# Altium PCB PCB1.PcbDoc
Units mil, origin at the board's own origin, x right, y up, seen from the top; angles counter-clockwise.
Board outline 3005 x 2305 mil, 4 copper layers (Top Layer, Power, GND, Bottom Layer), stack 27 mil thick; 35 components, 32 nets, 112 pads, 2 vias.
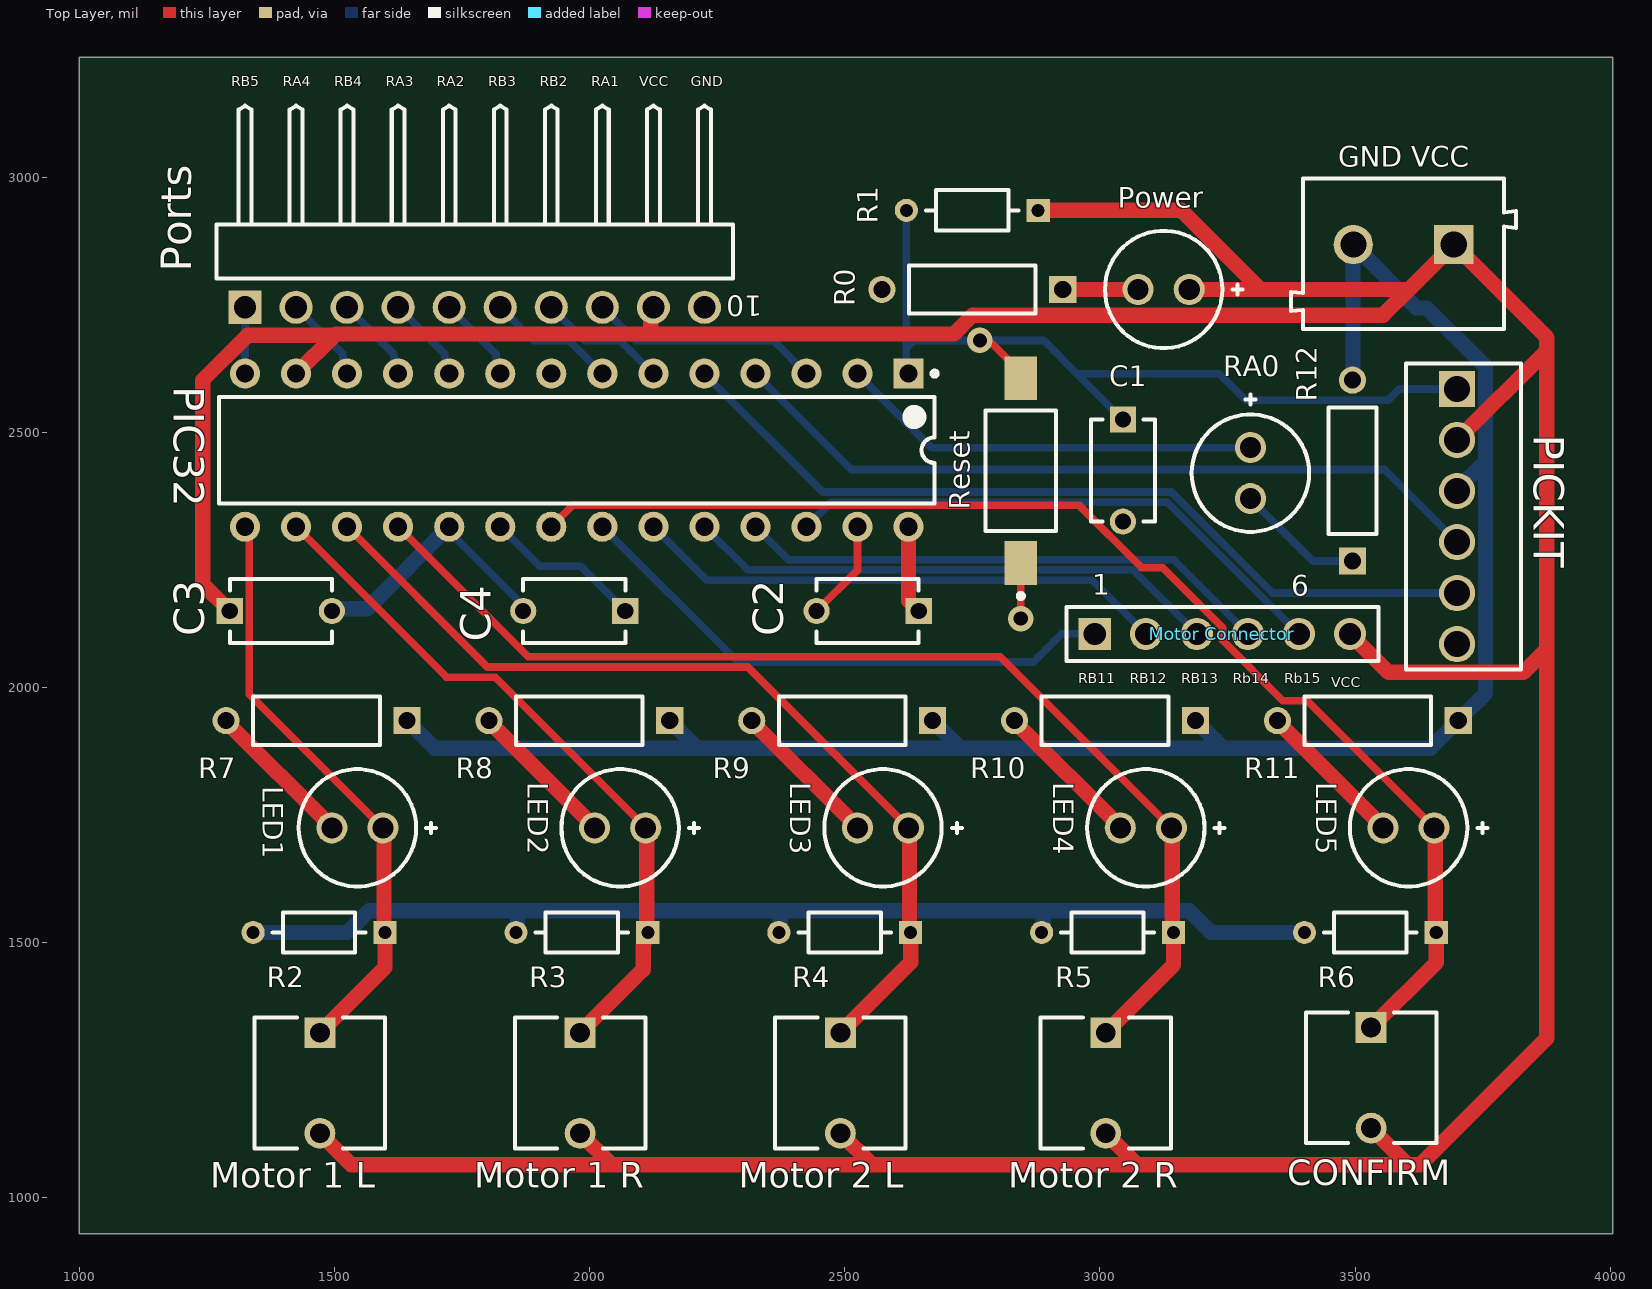
[diagram p0: Top Layer view]
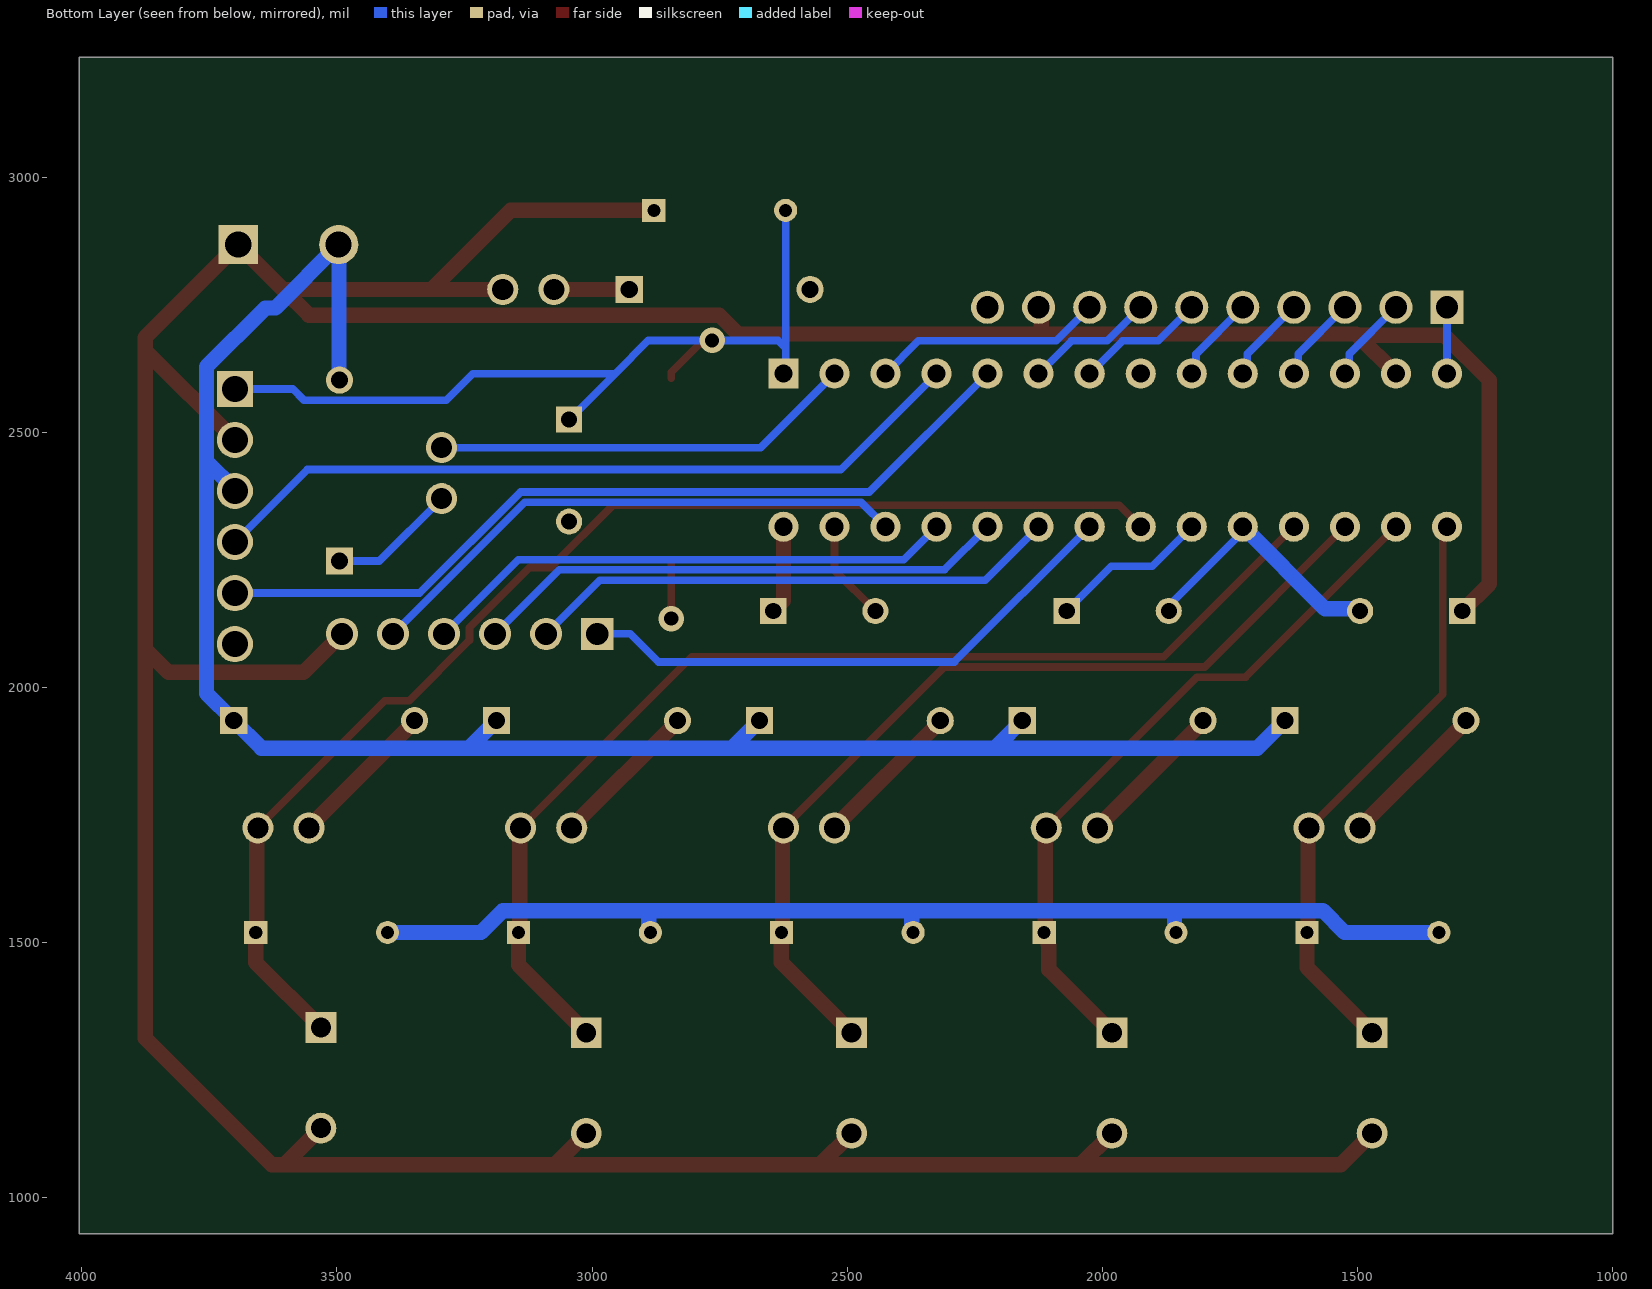
[diagram p1: Bottom Layer view, seen from below]
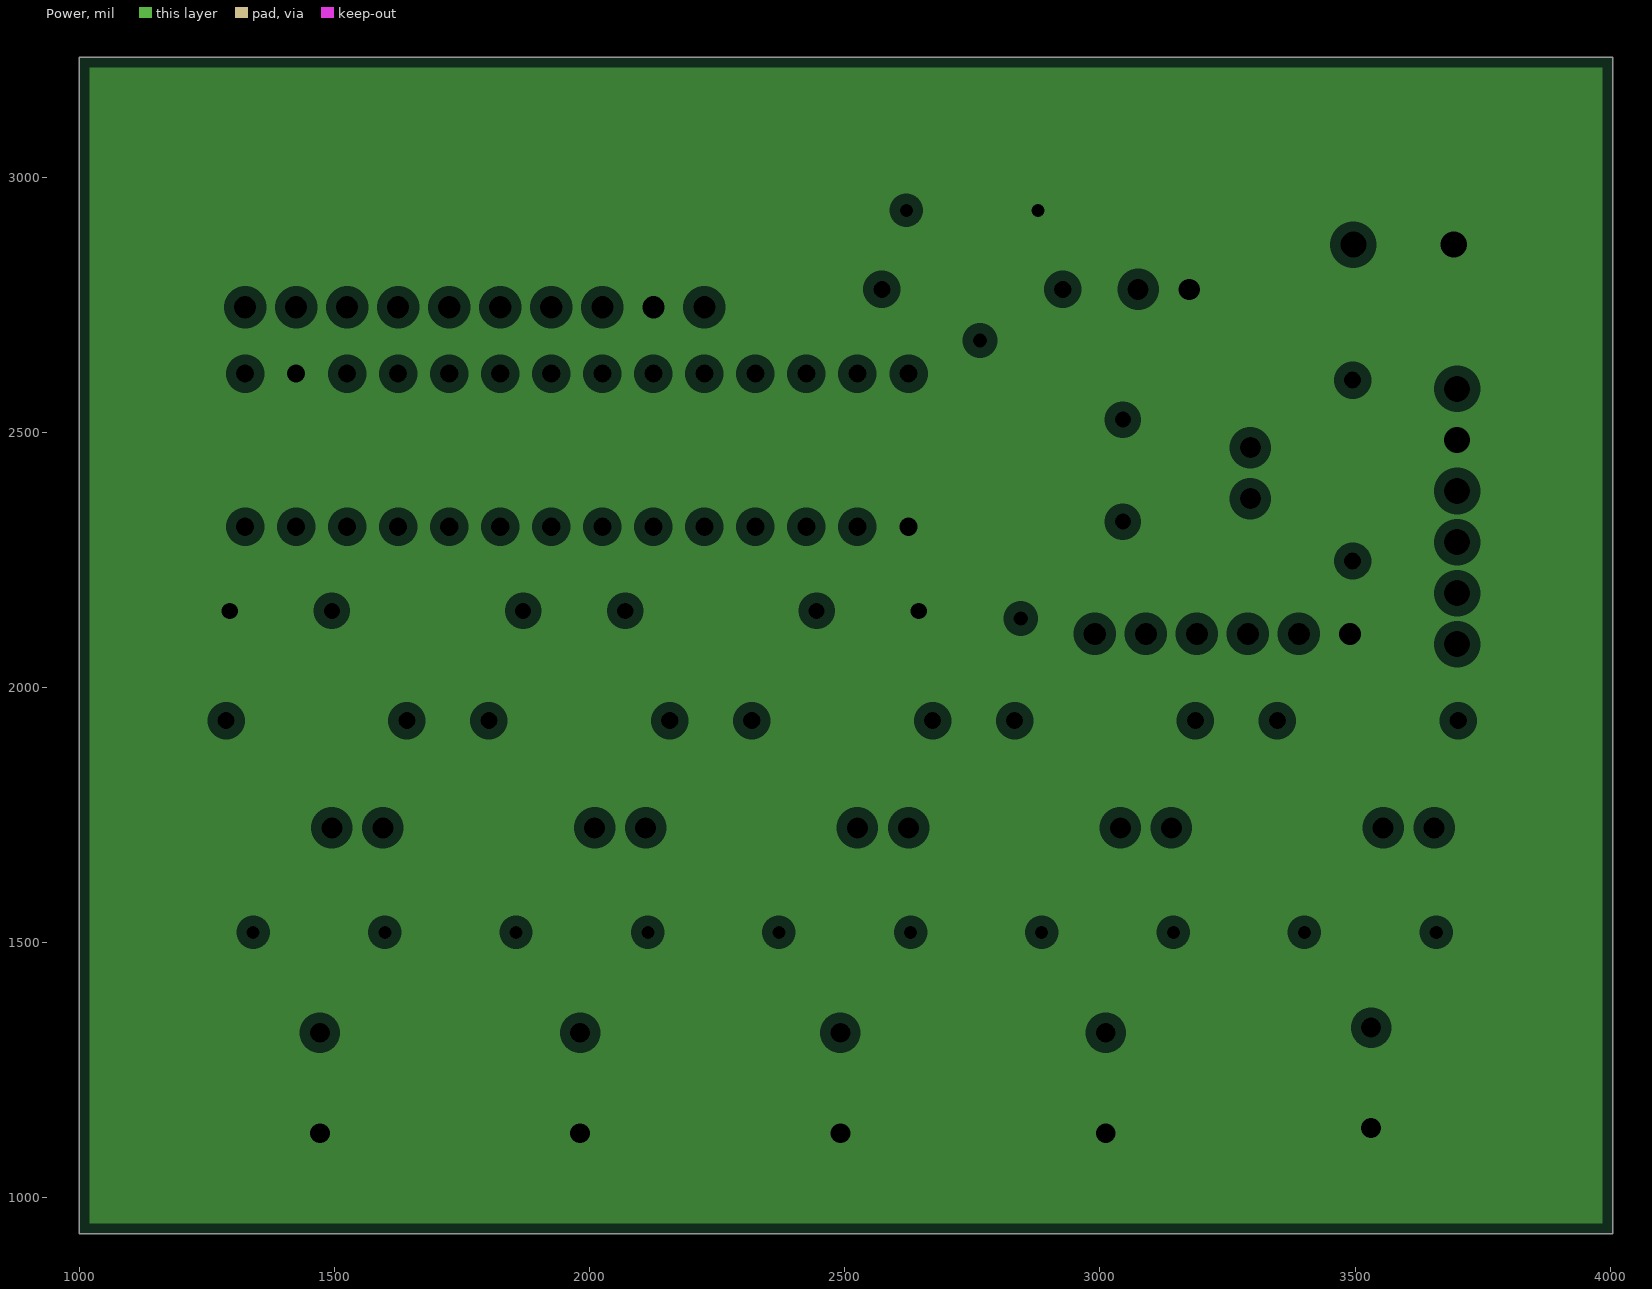
[diagram p2: Power, clearances drawn from the general rule]
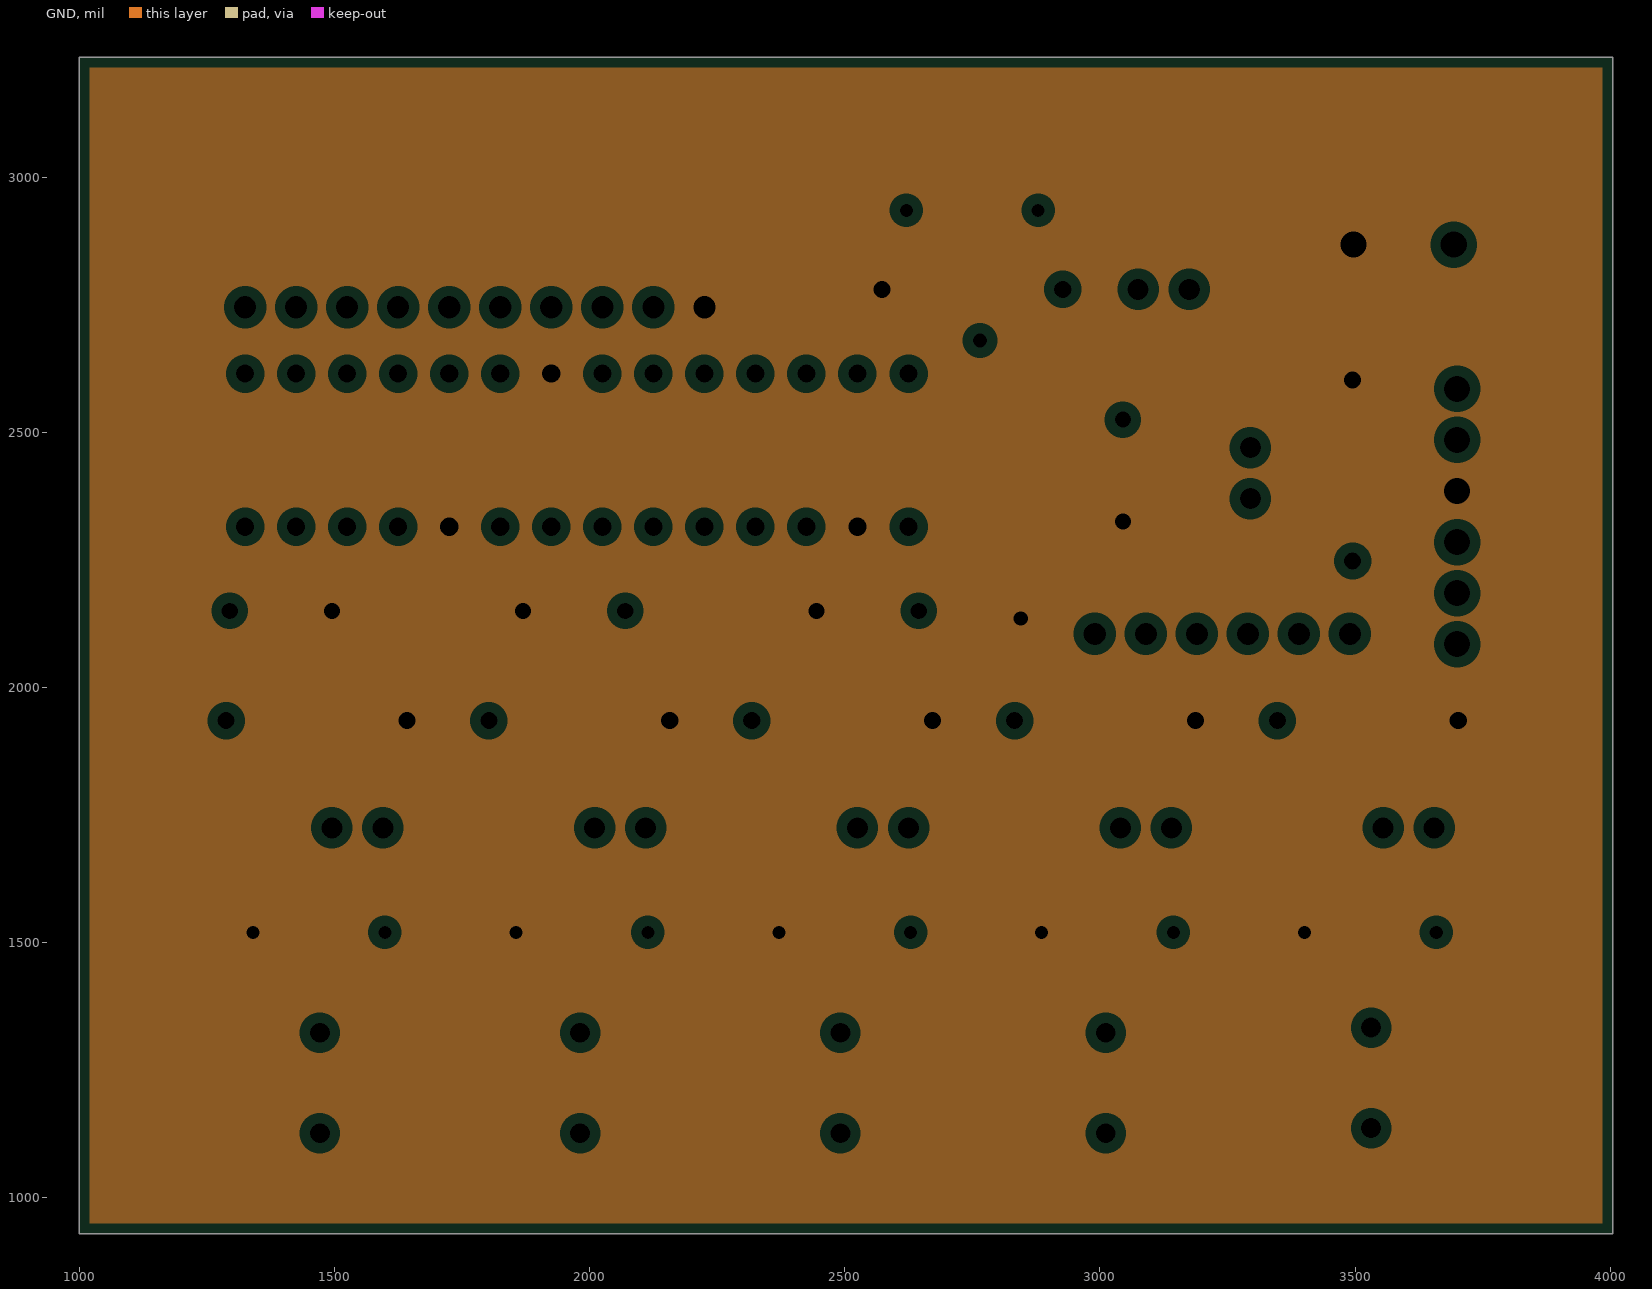
[diagram p3: GND, clearances drawn from the general rule]
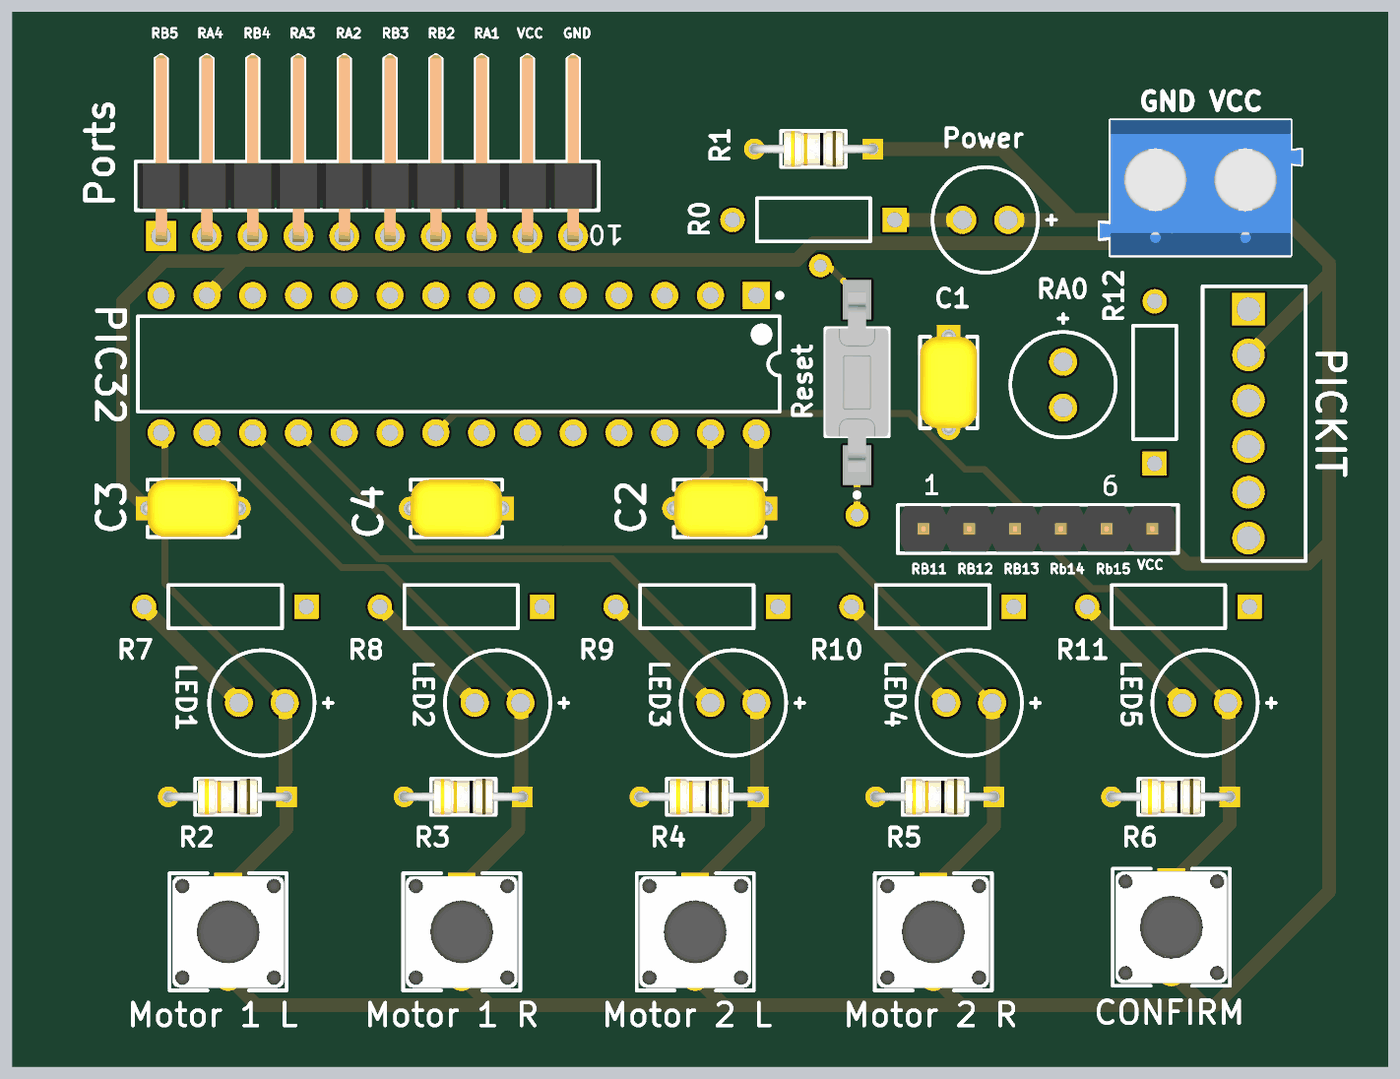
[diagram p4: 3D render of the assembled board from above, using the file's embedded part models]

## Layer stack, top to bottom
Top Solder: solder mask 0.4, Solder Resist, Dk 3.5
Top Layer: signal copper 3
Dielectric 2: prepreg 2.8, PP-006, Dk 4.1
Power: plane copper 1.4, net +3.3
Dielectric 1: dielectric 12.6, FR-4, Dk 4.8
GND: plane copper 1.4, net GND
Dielectric 3: prepreg 2.8, PP-006, Dk 4.1
Bottom Layer: signal copper 3
Bottom Solder: solder mask 0.4, Solder Resist, Dk 3.5

## Board outline
1000,930 4005,930 4005,3235 1000,3235

## Design rules (kind name [scope] priority, off if disabled: settings)
AcuteAngle [All] p1: minimum=4.50000000000000E+0001 checktracksonly=FALSE
Clearance [All] p1: gap=5 ignorepadtopadclearanceinfootprint=FALSE
DiffPairsRouting [All] p1: maxlimit=10 minlimit=10 mostfreqgap=10 toplayer_minwidth=10 toplayer_maxwidth=30 toplayer_prefwidth=15 bottomlayer_minwidth=10 bottomlayer_maxwidth=30 bottomlayer_prefwidth=15 maxuncoupledlength=500
HoleSize [All] p1: absolutevalues=TRUE maxlimit=250 minlimit=5 maxpercent=80.000 minpercent=20.000
HoleToHoleClearance [All] p1: gap=30 allowstackedmicrovias=TRUE
PlaneClearance [All] p1: clearance=20
PlaneConnect [All] p1: planeconnectstyle=Relief reliefexpansion=20 reliefentries=4 reliefconductorwidth=10 reliefairgap=10
PolygonConnect [All] p1: connectstyle=Relief reliefconductorwidth=10 reliefentries=4 polygonreliefangle="90 Angle" airgapwidth=10
RoutingVias [All] p1: holewidth=28 width=50 viastyle="Through Hole" minholewidth=28 minwidth=50 maxholewidth=28 maxwidth=50
SilkToSolderMaskClearance [IsPad] p1: minsilkscreentomaskgap=5 clearancetoexposedcopper=TRUE
SolderMaskExpansion [All] p1: expansion=5 istentingtop=FALSE
UnRoutedNet [All] p1: checkbadconnections=TRUE
Width [All] p1: maxlimit=30 minlimit=10 preferedwidth=15
23 further rules are at their usual default settings.

## Components (designator, comment, footprint, x,y, rotation, side; value= is the part's Value field where it differs from the comment)
C1 "0.1uF" FP-C322C104K5R5TA-MFG 3045,2425 r270 top
C2 "0.1uF" FP-C322C104K5R5TA-MFG 2545,2150 r180 top
C3 "0.1uF" FP-C322C104K5R5TA-MFG 1395,2150 r0 top
C4 "10uF" FP-C322C104K5R5TA-MFG 1970,2150 r180 top
CONFIRM "FSM4JRT" FP-FSM4JRT-MFG 3531.5,1235 r270 top
"GND VCC" "691102710002" 691102710002 3595,2850 r180 top (schematic designator Power)
LED1 "HLMP-4740" AVAG-HLMP-4740 1545,1725 r180 top
LED2 "HLMP-4740" AVAG-HLMP-4740 2060,1725 r180 top
LED3 "HLMP-4740" AVAG-HLMP-4740 2575,1725 r180 top
LED4 "HLMP-4740" AVAG-HLMP-4740 3090,1725 r180 top
LED5 "HLMP-4740" AVAG-HLMP-4740 3605,1725 r180 top
"Motor 1 L" "FSM4JRT" FP-FSM4JRT-MFG 1471.5,1225 r270 top (schematic designator motor1_L)
"Motor 1 R" "FSM4JRT" FP-FSM4JRT-MFG 1981.5,1225 r270 top (schematic designator motor1_R)
"Motor 2 L" "FSM4JRT" FP-FSM4JRT-MFG 2491.5,1225 r270 top (schematic designator motor2_L)
"Motor 2 R" "FSM4JRT" FP-FSM4JRT-MFG 3011.5,1225 r270 top (schematic designator motor2_R)
"Motor Connector" "61300611121" 61300611121 3240,2105 r0 top
PIC32 "PIC32MX150F128B-I/SP" MCHP-SPDIP-SP28 1975,2465 r270 top
PICKIT "640456-6" TECO-640456-6_V 3700,2585 r270 top
Ports "61301011021" 61301011021 1775,2854.06 r180 top
Power "HLMP-3507" AVAG-HLMP-3507 3125,2780 r180 top (schematic designator "Power LED")
R0 "1k" RESA60-630X240 2750,2780 r180 top
R1 "10k" FP-CF18-MFG 2750,2935 r180 top value=10kΩ
R2 "10k" FP-CF18-MFG 1470,1520 r180 top value=10kΩ
R3 "10k" FP-CF18-MFG 1985,1520 r180 top value=10kΩ
R4 "10k" FP-CF18-MFG 2500,1520 r180 top value=10kΩ
R5 "10k" FP-CF18-MFG 3015,1520 r180 top value=10kΩ
R6 "10k" FP-CF18-MFG 3530,1520 r180 top value=10kΩ
R7 "MFR-25FBF52-221R" RESA60-630X240 1465,1935 r180 top
R8 "MFR-25FBF52-221R" RESA60-630X240 1980,1935 r180 top
R9 "MFR-25FBF52-221R" RESA60-630X240 2495,1935 r180 top
R10 "MFR-25FBF52-221R" RESA60-630X240 3010,1935 r180 top
R11 "MFR-25FBF52-221R" RESA60-630X240 3525,1935 r180 top
R12 "1k" RESA60-630X240 3495,2425 r90 top
RA0 "HLMP-3507" AVAG-HLMP-3507 3295,2420 r270 top (schematic designator "On Board LED")
Reset "" TECO-FSMSM-2_V 2845,2425 r90 top

## Footprints (in the part's own frame and the unit in brackets; to place one, negate y for a bottom-side part, rotate by r counter-clockwise, add the part's x,y. Pads: shape width x height; smd on the part's side, far side on the other; paste and mask are expansions set on the pad)
61300611121 [mm] "Pin Header, pitch 2.54 mm, THT, Vertical, single row, 6p"
  rect 1.6x1.6 hole 1.1: 1(-6.35,0)
  round 1.6 hole 1.1: 2(-3.81,0) 3(-1.27,0) 4(1.27,0) 5(3.81,0) 6(6.35,0)
  silkscreen extent -7.77,-1.35 7.77,1.35, body extent -7.62,-1.27 7.62,1.27, height 8.57
61301011021 [mm] "Pin Header, pitch 2.54 mm, THT, Angled, single row, 10p"
  rect 1.65x1.65 hole 1.1: 1(11.43,2.77)
  round 1.65 hole 1.1: 2(8.89,2.77) 3(6.35,2.77) 4(3.81,2.77) 5(1.27,2.77) 6(-1.27,2.77) 7(-3.81,2.77) 8(-6.35,2.77) 9(-8.89,2.77) 10(-11.43,2.77)
  silkscreen extent -12.85,-7.27 12.85,1.35, body extent -12.7,-7.27 12.7,3.09, height 2.58
691102710002 [mm] "5,00mm - modular - blue - Horizontal entry with pressure clamp - 9,9 mm height - 02p"
  rect 1.95x1.95 hole 1.3: 1(-2.5,-0.45)
  round 1.95 hole 1.3: 2(2.5,-0.45)
  silkscreen extent -5.6,-3.75 5.6,3.75, body extent -5.6,-3.75 5.6,3.75, height 9.96
AVAG-HLMP-3507 [mm] "THD, 2-Leads, Dia 5.845mm, Pitch 2.54mm"
  round 1.55 hole 1.05: 1(-1.27,0) 2(1.27,0)
  silkscreen extent -3.92,-2.92 2.92,2.92
AVAG-HLMP-4740 [mm] "THD, 2-Leads, Dia 5.845mm, Pitch 2.54mm"
  round 1.55 hole 1.05: 1(-1.27,0) 2(1.27,0)
  silkscreen extent -3.92,-2.92 2.92,2.92
FP-C322C104K5R5TA-MFG [mm]
  rect 1.3x1.3 hole 0.8 paste-1000 mask+0: 1(-2.54,0)
  round 1.3 hole 0.8 paste-1000 mask+0: 2(2.54,0)
  silkscreen extent -2.54,-1.59 2.54,1.59, body extent -3.29,-1.69 3.29,1.69, height 0.25
FP-CF18-MFG [mm]
  rect 1.15x1.15 hole 0.65 paste-1000 mask+0: 1(-3.28,0)
  round 1.15 hole 0.65 paste-1000 mask+0: 2(3.28,0)
  silkscreen extent -2.3,-1 2.3,1, body extent -3.96,-1.1 3.96,1.1, height 0.25
FP-FSM4JRT-MFG [mil]
  rect 60.65x60.65 hole 39 paste-39370.1 mask+0: 1(-98.5,0)
  round 60.65 hole 39 paste-39370.1 mask+0: 2(98.5,0)
  silkscreen extent -128,-128 128,128, body extent -133,-132 133,132, height 10
MCHP-SPDIP-SP28 [mm] "DIP, 28-Leads, Body 34.86x6.79mm, Pitch 2.54mm"
  rect 1.5x1.5 hole 0.9: 1(-3.81,16.51)
  round 1.5 hole 0.9: 2(-3.81,13.97) 3(-3.81,11.43) 4(-3.81,8.89) 5(-3.81,6.35) 6(-3.81,3.81) 7(-3.81,1.27) 8(-3.81,-1.27) 9(-3.81,-3.81) 10(-3.81,-6.35) 11(-3.81,-8.89) 12(-3.81,-11.43) 13(-3.81,-13.97) 14(-3.81,-16.51) 15(3.81,-16.51) 16(3.81,-13.97) 17(3.81,-11.43) 18(3.81,-8.89) 19(3.81,-6.35) 20(3.81,-3.81) 21(3.81,-1.27) 22(3.81,1.27) 23(3.81,3.81) 24(3.81,6.35) 25(3.81,8.89) 26(3.81,11.43) 27(3.81,13.97) 28(3.81,16.51)
  silkscreen extent -3.93,-17.8 2.65,17.94, body extent -3.95,-17.77 3.95,17.77, height 5.08
RESA60-630X240 [mm] "Axial Resistor, 2-Leads, Dia 2.4mm, Body Length 6.3mm"
  rect 1.35x1.35 hole 0.85: 1(-4.5,0)
  round 1.35 hole 0.85: 2(4.5,0)
  silkscreen extent -3.15,-1.2 3.15,1.2, body extent -3.15,-1.2 3.15,1.2, height 2.4
TECO-640456-6_V [mm] "THD, 6-Leads, Body 15.24x5.72mm, Pitch 2.54mm"
  rect 1.8x1.8 hole 1.3: 1(0,0)
  round 1.8 hole 1.3: 2(2.54,0) 3(5.08,0) 4(7.62,0) 5(10.16,0) 6(12.7,0)
  silkscreen extent -1.27,-2.54 13.97,3.18, body extent -1.27,-2.54 13.97,3.18, height 10.03
TECO-FSMSM-2_V [mm] "SMD, 2-Leads, Body 6x3.5mm, Pitch 9.19mm"
  rect 2.2x1.6 smd: 1(-4.595,0)
  rect 2.18x1.6 smd: 2(4.595,0)
  silkscreen extent -6.37,-1.75 3,1.75, body extent -4.98,-1.75 4.98,1.75, height 4.4

## Part data
C1 C2 C3 C4: library part CMP-03020-034661-1, "CAP CER 0.1UF 50V X7R RADIAL / C322C104K5R5TA", Capacitance=100nF, Case/Package=Radial, Dielectric=X7R, Dielectric Material=Ceramic, Max Operating Temperature=125°C, Min Operating Temperature=-55°C, Package Quantity=500, Tolerance=10%, Voltage=50V, Construction=RADIAL, Depth=3.18mm, Dissipation Factor=2.5%, Height=3.18mm, Height - Seated (Max)=0.26inch, Lead Diameter=0.51mm, Lead Free="Lead Free", Lead Length=7mm, Lead Pitch=5.08mm, Lead/Base Style="Formed Leads", Length=5.08mm, Material=Ceramic, Mount="Through Hole", Number of Pins=2, Packaging=Bulk, Radiation Hardening=No, REACH SVHC="No SVHC", RoHS Compliant=Yes, Series="Golden Max™", Termination=Radial, Voltage Rating=50V, Voltage Rating (DC)=50V, Weight=0.0625lb, Width=0.125inch
CONFIRM "Motor 1 L" "Motor 1 R" "Motor 2 L" "Motor 2 R": library part CMP-03407-000038-1, "SWITCH TACTILE SPST-NO 0.05A 24V", Case/Package=Radial, Contact Current Rating=50mA, Contact Resistance=100mR, Max Operating Temperature=105°C, Max Voltage Rating (DC)=12V, Min Operating Temperature=-35°C, Operating Force=1.57N, Package Quantity=10000, Actuator Diameter=3.5mm, Actuator Length=0.055inch, Actuator Material=Resin, Actuator Type=Standard, Contact Material="Copper Alloy", Contact Plating=Silver, Current Rating=50mA, Depth=6.19mm, Electrical Life=100000Cycles, Illumination Type=Non-Illuminated, Length=6.19mm, Max Current Rating=50mA, Mechanical Life=100000Cycles, Mount="Through Hole", Orientation=Straight, Packaging="Tape and Reel", Radiation Hardening=No, RoHS Compliant=Yes, Series=FSMJRT, Switch Function=Off-Mom, Switch Travel=0.25mm, Termination="PC Pins", Throw Configuration=SPST, Type=Switch, Voltage Rating (DC)=12V
"GND VCC": library part CMP-1502-03258-1, "Series 102 - 5.00 mm Horizontal Entry Modular with Pressure Clamp WR-TBL, 2 pin", Manufacturer="Wurth Elektronik", Operating Temperature=-40to105degC, Datasheet URL=http://katalog.we-online.de/em/datasheet/6911027100xx.pdf, Manufacturer URL=http://www.we-online.de, Mounting Technology=THT, Package Reference=691102710002, Packaging=Box, Part Number=691102710002, Pin Number=2, Pitch=5.00mm, Publisher=WurthElektronik
LED1 LED2 LED3 LED4 LED5: library part CMP-2000-06413-1, "T-1 3/4 (5 mm) Low Current LED Lamp, Green, 1.9 V, -20 to 100 degC, 2-Pin THD, RoHS, Bulk", Color=Green, Dominant Wavelength/Color Temperature=569nm, Manufacturer=AvagoTechnologies, Package=2T-13/4, Package Description="2-Pin Through Hole Device, Dia 5.845 mm, Pitch 2.54 mm", Category=LEDs, Datasheet URL=http://docs.avagotech.com/docs/AV02-1557EN, Datasheet Version=07/2014, Intensity=2.3mcd, Lens Appearance=ColoredDiffused, Lens Shape Type=Circular, Manufacturer URL=http://www.avagotech.com/, Mounting=ThroughHole, Mounting Orientation=TopMount, Mounting Technology=ThroughHole, Number of LEDs=1, Package Reference=HLMP-4740, Packaging=Bulk, Peak Wavelength=565nm, Pin Count=2, Rad Hard=No, Type=Uni-Color, Viewing Angle=50°
"Motor Connector": library part CMP-1502-01070-1, "THT Vertical Pin Header WR-PHD, Pitch 2.54 mm, Single Row, 6 pins", Contact Resistance=20mOhm, Manufacturer="Wurth Elektronik", Operating Temperature=-40to105degC, Rated Current=3A, Withstanding Voltage=500VAC, Working Voltage=250VAC, Datasheet URL=https://katalog.we-online.de/em/datasheet/6130xx11121.pdf, Gender=Male, Manufacturer URL=http://www.we-online.de, Mounting Technology=THT, Orientation=Vertical, Package Reference=61300611121, Packaging=Bag, Part Number=61300611121, Pin Number=6, Pitch=2.54mm, Publisher=WurthElektronik, Row Number=Single
PIC32: library part CMP-0048-00469-1, "32-bit Microcontroller with Audio and Graphics Interface, USB and Advanced Analog, 50 MHz, 21 I/O, PMP, -40 to 85 degC, 28-pin SPDIP (SP28), Tube", Manufacturer=Microchip, ComponentLink1Description="Manufacturer URL", ComponentLink1URL=http://www.microchip.com, ComponentLink2Description=Datasheet, ComponentLink2URL=http://ww1.microchip.com/downloads/en/DeviceDoc/61168E.pdf, ComponentLink3Description="Package Specification", ComponentLink3URL=http://www.microchip.com/stellent/groups/techpub_sg/documents/packagingspec/en012702.pdf, ComponentLink4Description="Product URL", ComponentLink4URL=http://www.microchip.com/PIC32MX150F128B, DatasheetVersion="Rev. E", Mounting Technology="Through Hole", PackageDescription="28-Lead Plastic Dual In-Line, 34.86 x 6.79 mm Body, 2.54 mm Pitch", PackageReference=SPDIP-SP28, PackageVersion=C04-070B, PartNumber=PIC32MX150F128B-I/SP
PICKIT: library part CMP-2000-05661-1, "Male Header, Pitch 2.54 mm, 1 x 6 Position, Height 10.03 mm, Tail Length 3.56 mm, -55 to 105 degC, Bulk", Color=White, Current, Rating="5 /  / A", Flammability Rating=UL94V-0, Manufacturer="TE Connectivity", Package Description="Male Header, Pitch 2.54 mm, 1 x 6 Position, Height 10.03 mm, Tail Length 3.56 mm", Temperature, Operating="-55to+105 /  / °C", Voltage, Rating="250 /  / V", Agency Approvals=CSA,UL, Angle=Straight, Brand/Series=MTA-100Series, Color, Housing=White, Connector Type=MTA-100, Contact Centerline Spacing="0.100 /  / in.", Contact Mating Area Plating=Tin, Contact Plating=Tin, Contact Shape=Square, Contact Termination Area Plating=Tin, Datasheet URL=https://datasheet.ciiva.com/25618/0900766b80eb7fdd-25618163.pdf, Datasheet Version="Rev. W, 05/2005", Length, Overall="0.6 /  / \"", Length, Pin="0.14 /  / \"", Length, Terminal Post="0.14 /  / in.", Manufacturer URL=http://www.te.com/, Material, Contact=CopperAlloy, Material, Housing=Polyester, Mount Angle=Vertical, Mounting Hole Size="0.04 /  / \"", Mounting Technology=ThroughHole, Mounting Type=PCMount, Number of Contacts=6, Number of Positions=6, Number of Rows=1, Package Reference=640456-6, Pin Spacing="0.1 /  / \"", Primary Type=InterconnectSystem, Size, Post="0.025 /  / in.", Special Features=Pinstrip, Standards=RoHSCompliant,ELVCompliant,UL94V-0, Termination=Solder, Type=PCBPlug
Ports: library part CMP-1502-01081-1, "THT Angled Pin Header WR-PHD, Pitch 2.54 mm, Single Row, 10 pins", Contact Resistance=20mOhm, Manufacturer="Wurth Elektronik", Operating Temperature=-40to105degC, Rated Current=3A, Withstanding Voltage=500VAC, Working Voltage=250VAC, Datasheet URL=https://katalog.we-online.de/em/datasheet/6130xx11021.pdf, Gender=Male, Manufacturer URL=http://www.we-online.de, Mounting Technology=THT, Orientation=Angled, Package Reference=61301011021, Packaging=Bag, Part Number=61301011021, Pin Number=10, Pitch=2.54mm, Publisher=WurthElektronik, Row Number=Single
Power RA0: library part CMP-2000-06412-1, "T-1 3/4 (5 mm) Diffused LED Lamp, Green, 2.1 V, -20 to 100 degC, 2-Pin THD, RoHS, Bulk", Emitting Color=YellowGreen, Forward Current=25mA, Forward Voltage=2.7V, Manufacturer=Avago, Operating Temp Range=-40Cto100C, Operating Temperature Classification=Industrial, Package Description="2-Pin Through Hole Device, Dia 5.845 mm, Pitch 2.54 mm", Package Type=T-13/4, Power Dissipation=85W, Reverse Voltage=5V, Test Current (It)=10mA, Chip Material=GaP, Datasheet URL=http://docs.avagotech.com/docs/AV02-1558EN, Datasheet Version=03/2015, DELETED=Compliant, Dominant Wave Length=569nm, High Brightness=No, Lens Dimensions=5.08x5.08x8.3mm, Lens Type=ColoredDiffused, Lum Intensity=4.2mcd, Luminous Intensity=4.2mcd, Main Category=StandardLED, Manufacturer URL=http://www.avagotech.com/, Mounting=ThroughHole, Mounting Technology=ThroughHole, Number of  Elements=1, Package Reference=HLMP-3507, Peak Wavelength=565nm, Pin Count=2, Product Depth (mm)=6.1mm, Product Height (mm)=9.19mm, Product Length (mm)=6.1mm, Rad Hardened=No, Shape Type=Circular, Type=Uni-Color, Viewing Angle=60deg
R0 R12: library part CMP-1659-00075-1, "Axial Resistor, 1 KOhm, +/- 1%, 250 mW, -55 to 155 degC, 2-Pin THD, RoHS, Bulk / MFR-25FBF52-1K", Case\Package=Axial, Max Operating Temperature="155 degC", Min Operating Temperature="-55 degC", Package Quantity=200, Power Rating="250 mW", Resistance="10 kohm", Tolerance=1%, Voltage Rating="250 V", ComponentLink1Description="Manufacturer URL", ComponentLink1URL=http://www.yageo.com/, ComponentLink2Description=Datasheet, ComponentLink2URL=http://www.yageo.com/documents/recent/Yageo%20LR_MFR_2013.pdf, DatasheetVersion=Apr-13, Length="0.248 inch", PackageDescription="2-Pin Axial Lead, Dia 2.4 mm, Body Length 6.3 mm", PackageReference=MFR-25, Packaging=Bulk, RoHSCompliant=true
R1 R2 R3 R4 R5 R6: library part CMP-26528-000002-1, "RES 10K OHM 1/8W 5% CF AXIAL / CF18JT10K0", Manufacturer="Stackpole Electronics", Manufacturer Part Number=CF18JT10K0, Package=CF18, Power Rating=0.125W, Resistance=10kΩ, Temperature="-55°C to +155°C", Temperature Coefficient=0-500ppm/°C, Temperature Range High=+155°C, Temperature Range Low=-55°C, Tolerance=5%, Voltage Rating=250V, Automotive=No, Category=Res, ComponentLink2Description=Datasheet, ComponentLink2URL=http://www.seielect.com/Catalog/SEI-CF_CFM.pdf, Composition="Carbon Film", Device Class L1="Passive Components", Device Class L2=Resistors, Device Class L3="Through-Hole Resistors", Digikey Description="RES 10K OHM 1/8W 5% CF AXIAL", Height=2mm, Ipc Land Pattern Name=RESAD656W65L360D200, Lead Free=Yes, Octopart=https://octopart.com/cf18jt10k0-stackpole+electronics-19205642, RoHS=TRUE, Series=CF
R7 R8 R9 R10 R11: library part CMP-1659-00072-1, "Axial Resistor, 221 Ohm, +/- 1%, 250 mW, -55 to 155 degC, 2-Pin THD, RoHS, Bulk", Case\Package=QFN, Max Operating Temperature="85 degC", Max Supply Voltage="3.6 V", Min Operating Temperature="-40 degC", Min Supply Voltage="1.95 V", Nominal Supply Voltage="2.5 V", Package Quantity=1000, Bandwidth="800 Hz", ComponentLink1Description="Manufacturer URL", ComponentLink1URL=http://www.yageo.com/, ComponentLink2Description=Datasheet, ComponentLink2URL=http://www.yageo.com/documents/recent/Yageo%20LR_MFR_2013.pdf, DatasheetVersion=Apr-13, Height="0.95 mm", Interface=I2C, Length="3 mm", Mount="Surface Mount", PackageDescription="2-Pin Axial Lead, Dia 2.4 mm, Body Length 6.3 mm", PackageReference=MFR-25, Packaging="Tape and Reel", Pins=16, Radiation Hardening=No, REACH SVHC="No SVHC", RoHSCompliant=true, Weight="0.001122 oz"
Reset: library part CMP-2000-07511-1, "FSMSM Push Button Switch, 50 mA, -35 to 85 degC, 2-Pin SMD, RoHS, Bulk / FSMSM", Case\/Package=SMD/SMT, Contact Current Rating=50mA, Contact Resistance=100mOhm, Manufacturer="TE Connectivity", Max Operating Temperature=85degC, Max Voltage Rating (DC)=12V, Min Operating Temperature=-35degC, Operating Force=180gf, Package Description="2-Pin Surface Mount Device, Body 6 x 3.5 mm, Pitch 9.19 mm", Package Quantity=1000, Package Reference=FSMSM, Voltage Rating (DC)=24V, Actuator Length=1.07mm, Actuator Material=Polyamide, Contact Material=Brass, Contact Plating=Silver, Current Rating=50mA, Datasheet URL=http://www.te.com/commerce/DocumentDelivery/DDEController?Action=showdoc&DocId=Customer+Drawing%7F1437566-3%7FC2%7Fpdf%7FEnglish%7FENG_CD_1437566-3_C2_1437566_3_1_c.dwg.pdf%7F1437566-3, Datasheet Version="Rev. C2, 08/2014", Electrical Life=20000Cycles, ELV=Compliant, Illumination Type=Illuminated, Lead Free=LeadFree, Manufacturer URL=http://www.te.com/, Mechanical Life=20000Cycles, Mount=SurfaceMount, Mounting Technology=SurfaceMount, Orientation=Straight, Packaging=LoosePiece, REACH SVHC=Unknown, RoHSCompliant=true, Switch Travel=0.25mm, Termination=GullWing, Throw Configuration=SPST

## Via types
v1: diameter 50, hole 28, Top Layer to Bottom Layer, 2 vias

## Nets (pads, with @x,y where several pads share a name; then routed paths per layer and width w, separated by ;. In a path a pad name is that pad's centre, name@x,y a point inside that pad or via, vN(x,y) a via of type N, cw(c..) or ccw(c..) an arc to the next point about the centre after c; other vN are vias at no path point)
+3.3: "GND VCC.1" "Motor 1 L.2" "Motor 1 R.2" "Motor 2 L.2" "Motor 2 R.2" "Motor Connector.6" C2.1 C3.1 CONFIRM.2 PIC32.13 PIC32.28 PICKIT.2 Ports.9 Power.1 R1.1 | length 9509
  Top Layer w30: C3.1 1241.98,2203.02 1241.98,2602.03 1329.96,2690 1500,2690 ; PIC32.13 1500,2690 ; 1471.5,1126.5 1533,1065 2043,1065 ; 1981.5,1126.5 2043,1065 ; Ports.9 2120,2740 2120,2692.52 ; 2491.5,1126.5 2553,1065 ; PIC32.28 2625,2170 C2.1 ; R1.1 3160,2935 3315,2780 ; 3011.5,1126.5 3073,1065 ; Power.1 3315,2780 ; 3490,2105 3565.43,2029.57 3830.21,2029.57 3875.64,2075 ; CONFIRM.2 3603,1065 ; PICKIT.2 3875.64,2660.64 ; 1500,2690 1502.52,2692.52 2120,2692.52 ; 2043,1065 2553,1065 ; 2120,2692.52 2713.88,2692.52 2750.85,2729.49 3555.2,2729.49 3605.71,2780 ; 2553,1065 3073,1065 ; 3073,1065 3603,1065 ; 3315,2780 3605.71,2780 ; 3603,1065 3627.85,1065 3875.64,1312.79 3875.64,2075 ; 3605.71,2780 3693.43,2867.72 3875.64,2685.5 3875.64,2660.64 ; 3875.64,2075 3875.64,2660.64
GND: "GND VCC.2" C1.2 C2.2 C3.2 C4.2 PIC32.8 PIC32.19 PIC32.27 PICKIT.3 Ports.10 R0.2 R2.2 R3.2 R4.2 R5.2 R6.2 R7.1 R8.1 R9.1 R10.1 R11.1 R12.2 Reset.1 | length 6815.6
  Top Layer w15: C2.2 2525,2230 PIC32.27 ; v1(2845,2135) Reset.1
  Bottom Layer w15: PIC32.19 1725,2304.79 1870,2159.79 C4.2
  Bottom Layer w30: R2.2 1525.57,1520 1568.21,1562.64 1860,1562.64 ; C3.2 1499.05,2154.05 1564.05,2154.05 PIC32.19 ; R7.1 1696.17,1881 2205,1881 ; R3.2 1858.79,1522.92 1858.79,1561.43 1860,1562.64 ; R8.1 2205,1887.17 2205,1881 ; R4.2 2373.79,1522.92 2373.79,1556.43 2380,1562.64 ; R9.1 2726.17,1881 ; R5.2 2888.79,1522.92 2888.79,1556.43 2895,1562.64 ; R10.1 3241.17,1881 ; R6.2 3217.69,1520 3175.06,1562.64 2895,1562.64 ; R12.2 3495.79,2602.95 3495.79,2866.93 3496.57,2867.72 3620.55,2743.74 3640.41,2743.74 3755.43,2628.72 3755.43,2443.32 ; PICKIT.3 3700,2387.88 3755.43,2443.32 ; 1860,1562.64 2380,1562.64 ; 2205,1881 2726.17,1881 ; 2380,1562.64 2895,1562.64 ; 2726.17,1881 3241.17,1881 ; 3241.17,1881 3648.16,1881 R11.1 3755.43,1988.27 3755.43,2443.32
NetC1_1: C1.1 PIC32.1 PICKIT.1 R1.2 Reset.2 | length 1709.2
  Top Layer w15: v1(2765,2680) 2771.7,2673.3 2789.02,2673.3 2845,2617.32 Reset.2
  Bottom Layer w15: R1.2 2620.87,2665 ; PIC32.1 2620.87,2619.13 2620.87,2665 ; C1.1 2955,2615 ; PICKIT.1 3586.4,2585 3564.49,2563.09 3285.7,2563.09 3233.79,2615 2955,2615 ; 2620.87,2665 2635.87,2680 2890,2680 2955,2615
NetC4_1: C4.1 PIC32.20 | length 313.3
  Bottom Layer w15: PIC32.20 1902.67,2237.33 1982.67,2237.33 C4.1
NetCONFIRM_1: CONFIRM.1 LED5.1 PIC32.21 R6.1 | length 2469.6
  Top Layer w15: PIC32.21 1967.03,2357.03 2959.1,2357.03 3080.97,2235.16 3122.05,2235.16 3240.38,2116.84 3240.38,2092.4 3358.71,1974.07 3405.93,1974.07 LED5.1
  Top Layer w30: CONFIRM.1 3659.13,1461.13 R6.1 3657.07,1522.07 3657.07,1722.93 LED5.1
NetLED1_1: "Motor 1 L.1" LED1.1 PIC32.15 R2.1 | length 1157.9
  Top Layer w15: PIC32.15 1333.09,2306.91 1333.09,1986.91 LED1.1
  Top Layer w30: 1471.5,1323.5 1599.13,1451.13 R2.1 1597.07,1522.07 1597.07,1722.93 LED1.1
NetLED1_2: LED1.2 R7.2 | length 295.8
  Top Layer w30: R7.2 1287.83,1933.58 1495,1726.42 LED1.2
NetLED2_1: "Motor 1 R.1" LED2.1 PIC32.16 R3.1 | length 1387.5
  Top Layer w15: PIC32.16 1719.81,2020.19 1814.81,2020.19 LED2.1
  Top Layer w30: 1981.5,1323.5 2105,1447 2105,1494.79 2106.5,1496.28 2106.5,1512.36 R3.1 2112.07,1522.07 2112.07,1722.93 LED2.1
NetLED2_2: LED2.2 R8.2 | length 295.8
  Top Layer w30: R8.2 1802.83,1933.58 2010,1726.42 LED2.2
NetLED3_1: "Motor 2 L.1" LED3.1 PIC32.17 R4.1 | length 1804.6
  Top Layer w15: PIC32.17 1799.81,2040.19 2309.81,2040.19 LED3.1
  Top Layer w30: 2491.5,1323.5 2629.13,1461.13 R4.1 2627.07,1522.07 2627.07,1722.93 LED3.1
NetLED3_2: LED3.2 R9.2 | length 295.8
  Top Layer w30: R9.2 2317.83,1933.58 2525,1726.42 LED3.2
NetLED4_1: "Motor 2 R.1" LED4.1 PIC32.18 R5.1 | length 2217.5
  Top Layer w15: PIC32.18 1879.81,2060.19 2804.81,2060.19 LED4.1
  Top Layer w30: 3011.5,1323.5 3144.13,1456.13 R5.1 3142.07,1522.07 3142.07,1722.93 LED4.1
NetLED4_2: LED4.2 R10.2 | length 295.8
  Top Layer w30: R10.2 2832.83,1933.58 3040,1726.42 LED4.2
NetLED5_2: LED5.2 R11.2 | length 295.8
  Top Layer w30: R11.2 3347.83,1933.58 3555,1726.42 LED5.2
"NetMotor Connector_1": "Motor Connector.1" PIC32.22 | length 1097.5
  Bottom Layer w15: PIC32.22 2290,2050 2870,2050 2925,2105 2990,2105
"NetMotor Connector_2": "Motor Connector.2" PIC32.23 | length 1052
  Bottom Layer w15: PIC32.23 2229.62,2210.38 2984.62,2210.38 3090,2105
"NetMotor Connector_3": "Motor Connector.3" PIC32.24 | length 1052
  Bottom Layer w15: PIC32.24 2309.62,2230.38 3064.62,2230.38 3190,2105
"NetMotor Connector_4": "Motor Connector.4" PIC32.25 | length 1052
  Bottom Layer w15: PIC32.25 2389.62,2250.38 3144.62,2250.38 3290,2105
"NetMotor Connector_5": "Motor Connector.5" PIC32.26 | length 1091.8
  Bottom Layer w15: PIC32.26 2473.09,2363.09 3131.91,2363.09 3390,2105
"NetOn Board LED_1": PIC32.2 RA0.1 | length 830.1
  Bottom Layer w15: PIC32.2 2670,2470 RA0.1
"NetOn Board LED_2": R12.1 RA0.2 | length 250.6
  Bottom Layer w15: RA0.2 3417.17,2247.83 R12.1
NetPIC32_3: PIC32.3 Ports.8 | length 453.8
  Bottom Layer w15: Ports.8 2090.57,2679.43 2360.57,2679.43 PIC32.3
NetPIC32_4: PIC32.4 PICKIT.4 | length 1511.7
  Bottom Layer w15: PIC32.4 2513.01,2426.99 3558.01,2426.99 PICKIT.4
NetPIC32_5: PIC32.5 PICKIT.5 | length 1653.1
  Bottom Layer w15: PIC32.5 2456.91,2383.09 3140.19,2383.09 3338.28,2185 PICKIT.5
NetPIC32_6: PIC32.6 Ports.7 | length 253.8
  Bottom Layer w15: Ports.7 1990.57,2679.43 2060.57,2679.43 PIC32.6
NetPIC32_7: PIC32.7 Ports.6 | length 253.8
  Bottom Layer w15: Ports.6 1890.57,2679.43 1960.57,2679.43 PIC32.7
NetPIC32_9: PIC32.9 Ports.5 | length 171.4
  Bottom Layer w15: Ports.5 1816.57,2653.43 1816.57,2623.43 PIC32.9
NetPIC32_10: PIC32.10 Ports.4 | length 171.4
  Bottom Layer w15: Ports.4 1716.57,2653.43 1716.57,2623.43 PIC32.10
NetPIC32_11: PIC32.11 Ports.3 | length 171.4
  Bottom Layer w15: Ports.3 1616.57,2653.43 1616.57,2623.43 PIC32.11
NetPIC32_12: PIC32.12 Ports.2 | length 171.4
  Bottom Layer w15: Ports.2 1516.57,2653.43 1516.57,2623.43 PIC32.12
NetPIC32_14: PIC32.14 Ports.1 | length 130
  Bottom Layer w15: PIC32.14 Ports.1
"NetPower LED_2": Power.2 R0.1 | length 147.8
  Top Layer w30: R0.1 Power.2
pads on no net: PICKIT.6

## Polygon pours and split planes (outlines as drawn)
+3.3 on Power (split plane): 3984.9,950.1 1020.1,950.1 1020.1,3214.9 3984.9,3214.9
GND on GND (split plane): 3984.9,950.1 1020.1,950.1 1020.1,3214.9 3984.9,3214.9

## Silkscreen, mask and mechanical layers (free items; w line width, h text height)
Top Overlay:
  text "RB5" at 1298,3178 h20
  text "RA4" at 1398.74,3178 h20
  text "RB4" at 1499.48,3178 h20
  text "RA3" at 1600.22,3178 h20
  text "RA2" at 1700.96,3178 h20
  text "RB3" at 1801.7,3178 h20
  text "RB2" at 1902.44,3178 h20
  text "RA1" at 2003.18,3178 h20
  text "VCC" at 2097.26,3178 h20
  text "GND" at 2198,3178 h20
  text "RB11" at 2958,2008 h20
  text "RB12" at 3058.74,2008 h20
  text "RB13" at 3159.48,2008 h20
  text "Rb14" at 3260.22,2008 h20
  text "Rb15" at 3360.96,2008 h20
  text "VCC" at 3453.7,2000 h20

## Text inside footprints (layer, text, board x,y; h text height)
"Motor Connector": Top Overlay "6" at 3375,2180 h40; Top Overlay "1" at 2985.28,2181.93 h40
Ports: Top Overlay "10" at 2337.99,2767.44 h40 r180